# EAGLE board ttl (EAGLE 5.01)
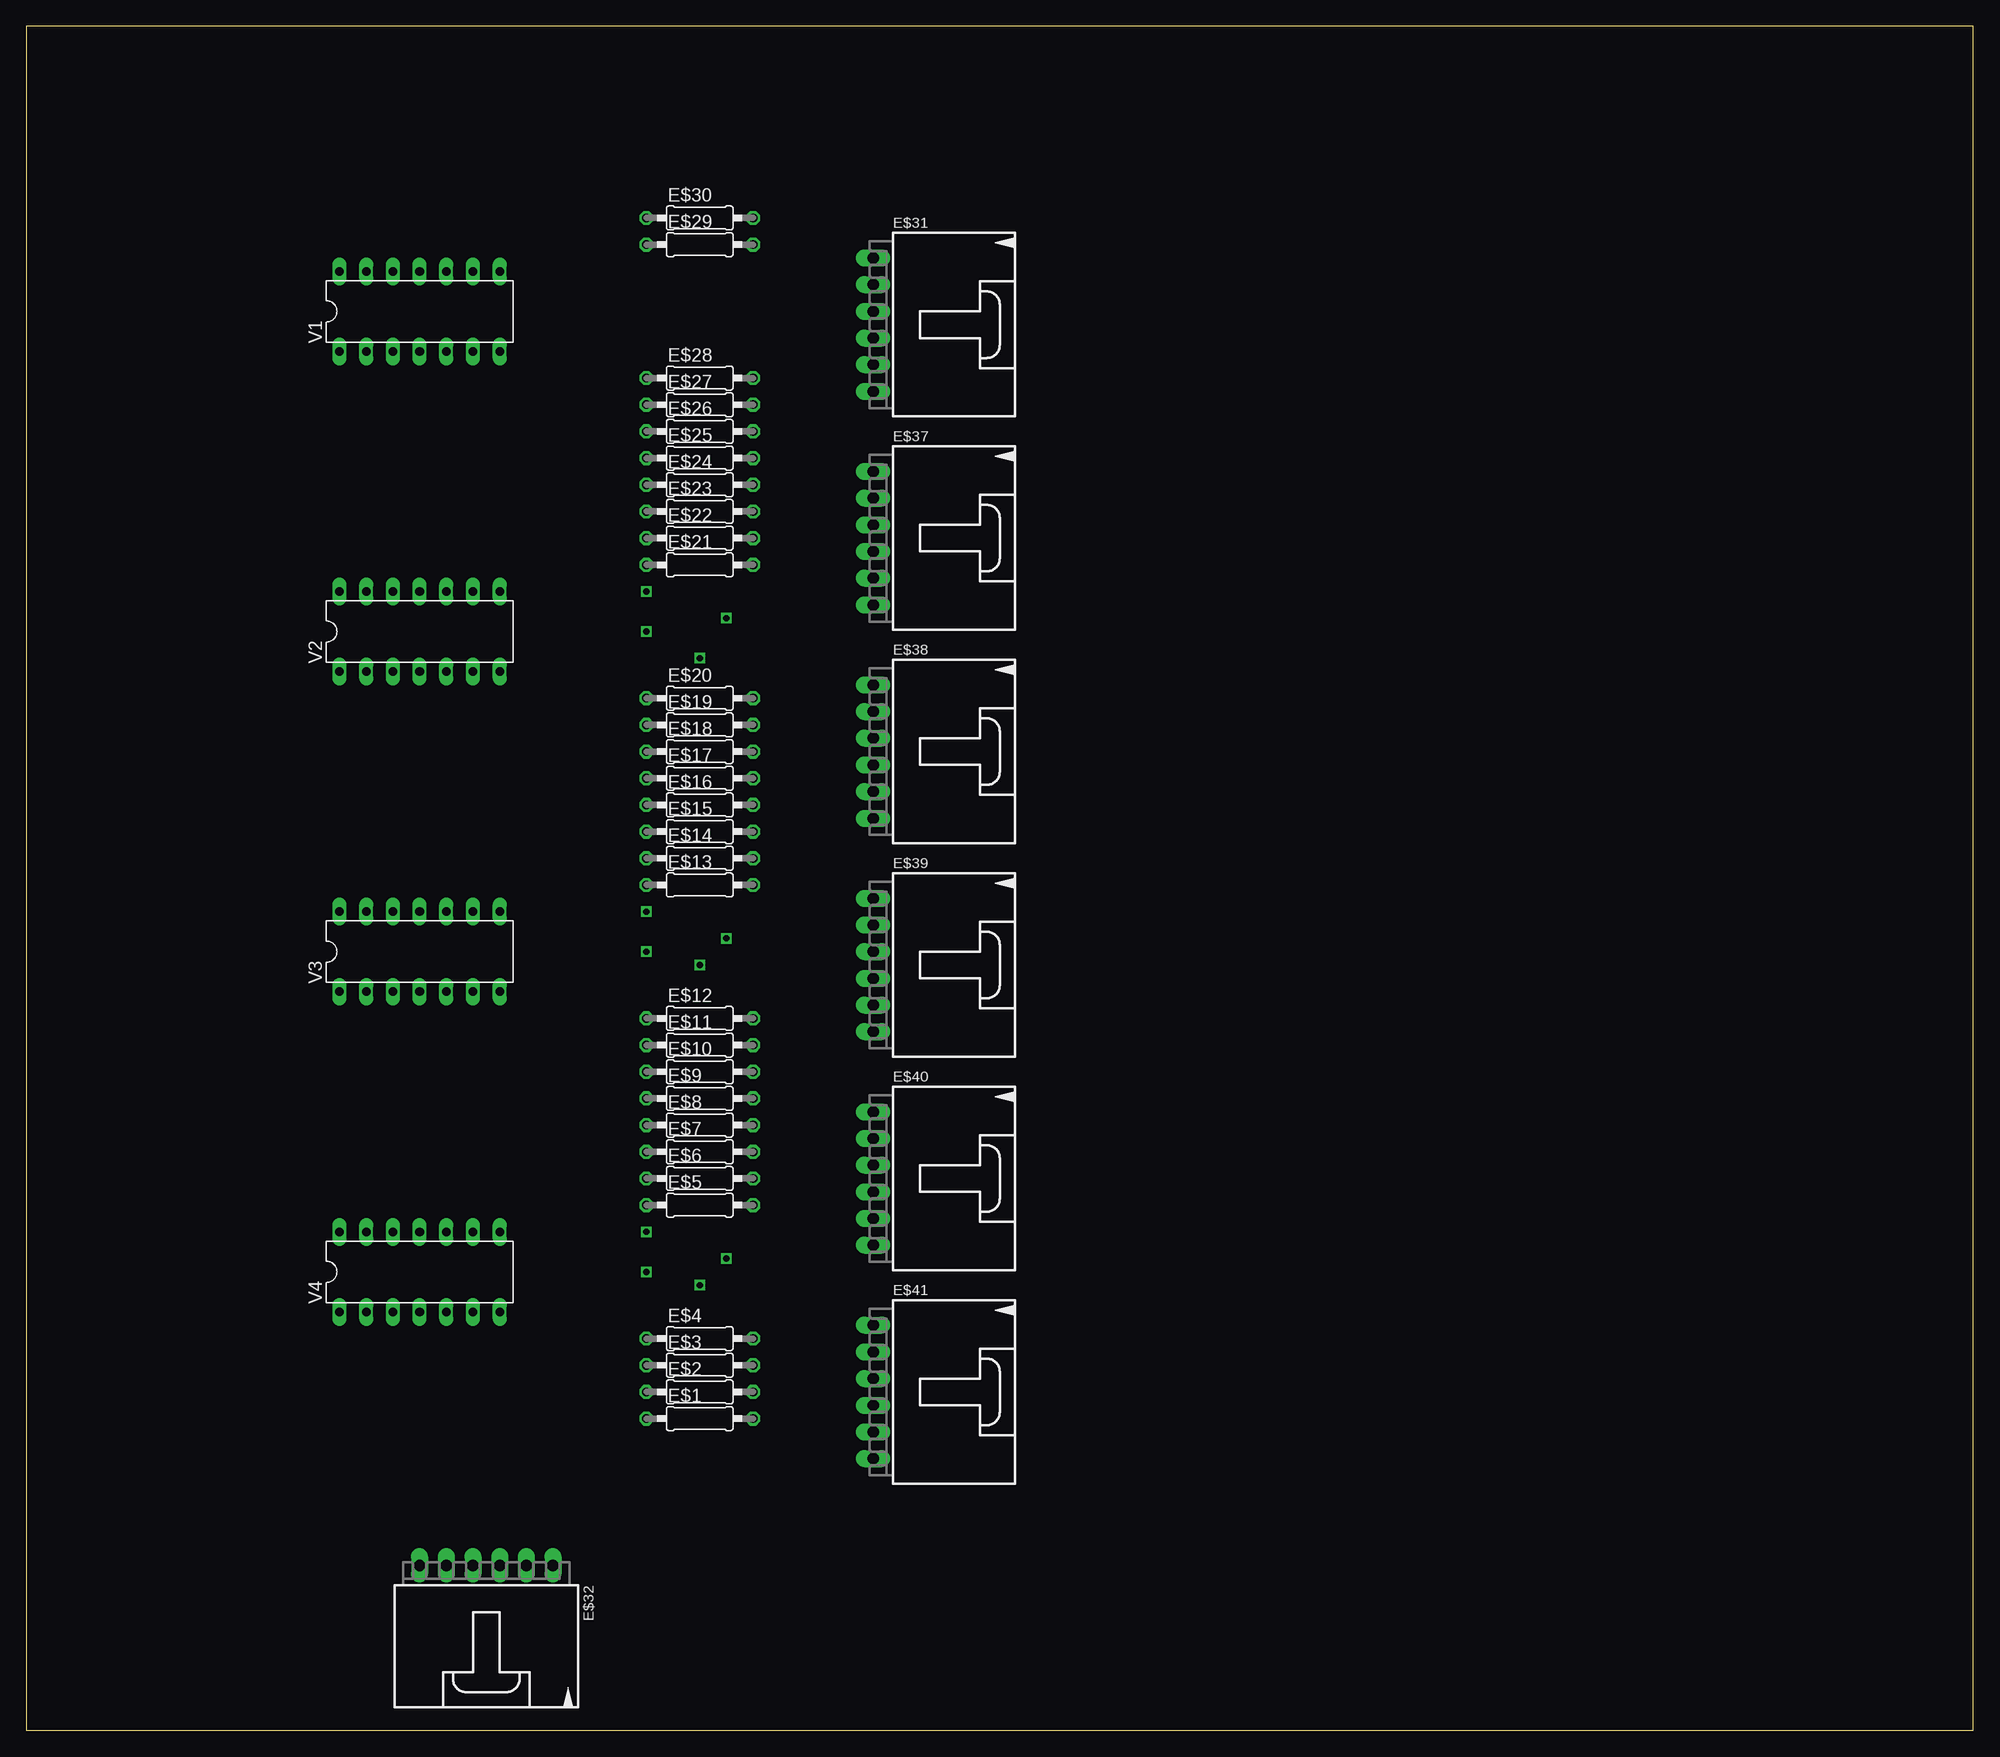
[diagram p0: board, top side]
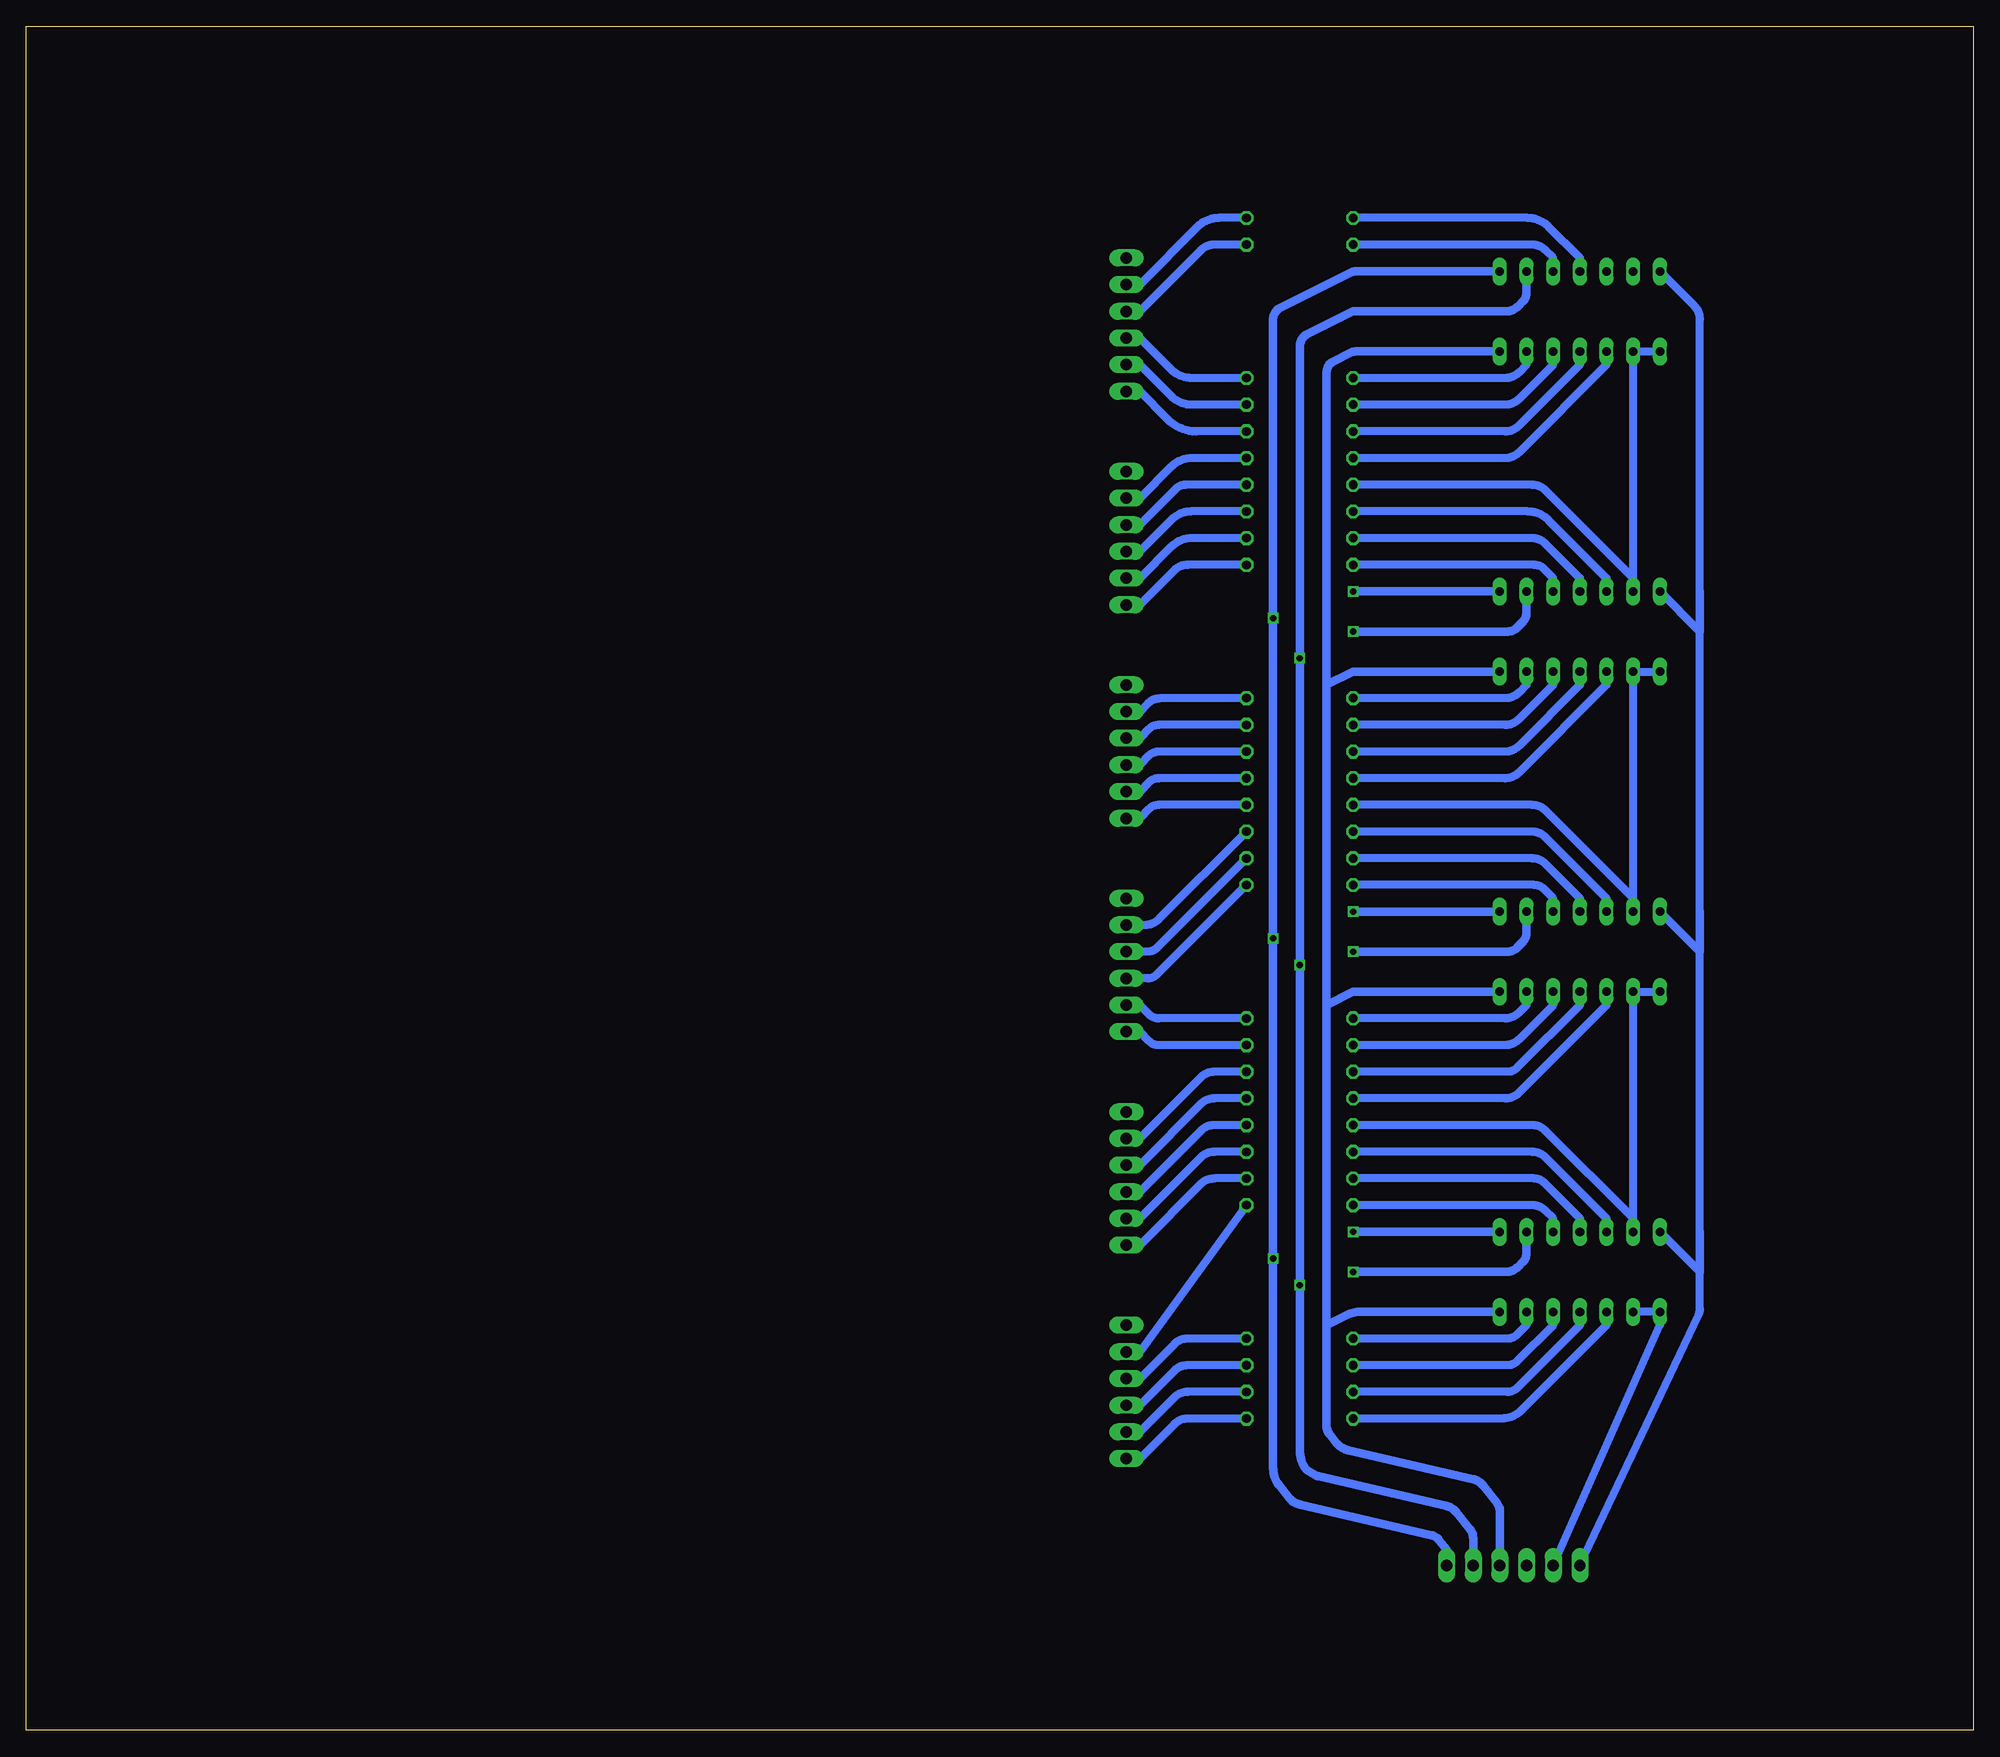
[diagram p1: board, bottom side, seen from below]

Size 185.4 x 162.23 mm. Coordinates in mm from the lower left corner, seen from the top.
Outline: 0,0 185.4,0 185.4,162.23 0,162.23 0,0
Copper layers (1*16): Top 0.035mm / dielectric 1.5mm / Bottom 0.035mm
Design rules "default *": minimum track width 30mil, minimum drill 24mil, track to track 8mil, track to pad 8mil, pad to pad 8mil, via to via 8mil, smd to smd 8mil, copper to edge 40mil, drill to drill 8mil, minimum pad ring 10mil, minimum via ring 8mil, stop-mask expansion 4mil, vias tented up to drill 0mil, thermal gap 10mil

## Footprints (pad centres in the part's own frame; a part is rotated, then mirrored left to right if it is on the bottom)
0207/10 = drill 0.813 octagon: 1 -5.08,0; 2 5.08,0
70553-06 = drill 1.092 long: 1 -6.35,-7.62; 2 -3.81,-7.62; 3 -1.27,-7.62; 4 1.27,-7.62; 5 3.81,-7.62; 6 6.35,-7.62
DIL14 = drill 0.813 long: 1 -7.62,-3.81; 2 -5.08,-3.81; 3 -2.54,-3.81; 4 0,-3.81; 5 2.54,-3.81; 6 5.08,-3.81; 7 7.62,-3.81; 8 7.62,3.81; 9 5.08,3.81; 10 2.54,3.81; 11 0,3.81; 12 -2.54,3.81; 13 -5.08,3.81; 14 -7.62,3.81

## Placement (x,y rotation side)
E$1  [0207/10]  64.13,29.68 0 top
E$2  [0207/10]  64.13,32.22 0 top
E$3  [0207/10]  64.13,34.76 0 top
E$4  [0207/10]  64.13,37.3 0 top
E$5  [0207/10]  64.13,50 0 top
E$6  [0207/10]  64.13,52.54 0 top
E$7  [0207/10]  64.13,55.08 0 top
E$8  [0207/10]  64.13,57.62 0 top
E$9  [0207/10]  64.13,60.16 0 top
E$10  [0207/10]  64.13,62.7 0 top
E$11  [0207/10]  64.13,65.24 0 top
E$12  [0207/10]  64.13,67.78 0 top
E$13  [0207/10]  64.13,80.48 0 top
E$14  [0207/10]  64.13,83.02 0 top
E$15  [0207/10]  64.13,85.56 0 top
E$16  [0207/10]  64.13,88.1 0 top
E$17  [0207/10]  64.13,90.64 0 top
E$18  [0207/10]  64.13,93.18 0 top
E$19  [0207/10]  64.13,95.72 0 top
E$20  [0207/10]  64.13,98.26 0 top
E$21  [0207/10]  64.13,110.96 0 top
E$22  [0207/10]  64.13,113.5 0 top
E$23  [0207/10]  64.13,116.04 0 top
E$24  [0207/10]  64.13,118.58 0 top
E$25  [0207/10]  64.13,121.12 0 top
E$26  [0207/10]  64.13,123.66 0 top
E$27  [0207/10]  64.13,126.2 0 top
E$28  [0207/10]  64.13,128.74 0 top
E$29  [0207/10]  64.13,141.44 0 top
E$30  [0207/10]  64.13,143.98 0 top
E$31  [70553-06]  88.26,133.82 270 top
E$32  [70553-06]  43.81,8.09 180 top
E$37  [70553-06]  88.26,113.5 270 top
E$38  [70553-06]  88.26,93.18 270 top
E$39  [70553-06]  88.26,72.86 270 top
E$40  [70553-06]  88.26,52.54 270 top
E$41  [70553-06]  88.26,32.22 270 top
V1  74164N  [DIL14]  37.46,135.09 0 top
V2  74164N  [DIL14]  37.46,104.61 0 top
V3  74164N  [DIL14]  37.46,74.13 0 top
V4  74164N  [DIL14]  37.46,43.65 0 top

## Library data of the parts
E$1-E$30 = resistor
E$31 E$32 E$37-E$41 = con-molex
V1-V4 = 74ttl-din

## Nets
S$1: E$1.2 E$41.6
S$2: E$2.2 E$41.5
S$3: E$3.2 E$41.4
S$4: E$4.2 E$41.3
S$5: E$5.2 E$41.2
S$6: E$6.2 E$40.6
S$7: E$7.2 E$40.5
S$8: E$8.2 E$40.4
S$9: E$9.2 E$40.3
S$10: E$10.2 E$40.2
S$11: E$11.2 E$39.6
S$12: E$12.2 E$39.5
S$13: E$13.2 E$39.4
S$14: E$14.2 E$39.3
S$15: E$15.2 E$39.2
S$16: E$16.2 E$38.6
S$17: E$17.2 E$38.5
S$18: E$18.2 E$38.4
S$19: E$19.2 E$38.3
S$20: E$20.2 E$38.2
S$21: E$21.2 E$37.6
S$22: E$22.2 E$37.5
S$23: E$23.2 E$37.4
S$24: E$24.2 E$37.3
S$25: E$25.2 E$37.2
S$27: V2.8
S$28: E$2.1 V4.4
S$29: E$3.1 V4.5
S$30: E$4.1 V4.6
S$31: E$5.1 V4.10
S$32: E$6.1 V4.11
S$33: E$7.1 V4.12
S$34: E$8.1 V3.1 V3.2 V4.13
S$35: E$9.1 V3.3
S$36: E$10.1 V3.4
S$37: E$11.1 V3.5
S$38: E$12.1 V3.6
S$39: E$13.1 V3.10
S$40: E$14.1 V3.11
S$41: E$15.1 V3.12
S$42: E$16.1 V2.1 V2.2 V3.13
S$43: E$17.1 V2.3
S$44: E$18.1 V2.4
S$45: E$19.1 V2.5
S$46: E$20.1 V2.6
S$47: E$21.1 V2.10
S$48: E$22.1 V2.11
S$49: E$23.1 V2.12
S$50: E$24.1 V1.1 V1.2 V2.13
S$55: E$26.2 E$31.6
S$56: E$27.2 E$31.5
S$57: E$28.2 E$31.4
S$58: E$29.2 E$31.3
S$59: E$30.2 E$31.2
S$61: E$32.6 V1.14 V2.14 V3.14 V4.14
S$62: E$32.5 V4.1 V4.2
S$63: E$32.4
S$65: E$1.1 V4.3
S$66: E$32.2
S$70: E$32.1 V1.8
S$71: V2.9
S$72: V3.8
S$74: V4.8
S$80: E$32.3 V1.7

## Tracks (layer width: path | path; a pad name or v marks a point on that pad's centre or on a via)
S$1
  Bottom 0.762: E$41.6 79.37,25.87 76.09,29.15 arc45 74.82,29.68 E$1.2
S$2
  Bottom 0.762: E$2.2 74.82,32.22 arc-45 76.09,31.69 79.37,28.41 E$41.5
S$3
  Bottom 0.762: E$3.2 74.82,34.76 arc-45 76.09,34.23 79.37,30.95 E$41.4
S$4
  Bottom 0.762: E$4.2 74.82,37.3 arc-45 76.09,36.77 79.37,33.49 E$41.3
S$5
  Bottom 0.762: E$5.2 79.37,36.03 E$41.2
S$6
  Bottom 0.762: E$6.2 72.28,52.54 arc-45 73.55,52.01 79.37,46.19 E$40.6
S$7
  Bottom 0.762: E$7.2 72.28,55.08 arc-45 73.55,54.55 79.37,48.73 E$40.5
S$8
  Bottom 0.762: E$8.2 72.28,57.62 arc-45 73.55,57.09 79.37,51.27 E$40.4
S$9
  Bottom 0.762: E$9.2 72.28,60.16 arc-45 73.55,59.63 79.37,53.81 E$40.3
S$10
  Bottom 0.762: E$10.2 72.28,62.7 arc-45 73.55,62.17 79.37,56.35 E$40.2
S$11
  Bottom 0.762: E$11.2 77.57,65.24 arc45 78.47,65.61 79.37,66.51 E$39.6
S$12
  Bottom 0.762: E$12.2 77.57,67.78 arc45 78.47,68.15 79.37,69.05 E$39.5
S$13
  Bottom 0.762: E$13.2 77.73,71.96 arc45 78.63,71.59 E$39.4
S$14
  Bottom 0.762: E$14.2 77.73,74.5 arc45 78.63,74.13 E$39.3
S$15
  Bottom 0.762: E$15.2 77.57,77.2 arc45 78.84,76.67 E$39.2
S$16
  Bottom 0.762: E$16.2 77.57,88.1 arc-45 78.47,87.73 79.37,86.83 E$38.6
S$17
  Bottom 0.762: E$17.2 77.57,90.64 arc-45 78.47,90.27 79.37,89.37 E$38.5
S$18
  Bottom 0.762: E$18.2 77.57,93.18 arc-45 78.47,92.81 79.37,91.91 E$38.4
S$19
  Bottom 0.762: E$19.2 77.57,95.72 arc-45 78.47,95.35 79.37,94.45 E$38.3
S$20
  Bottom 0.762: E$20.2 77.36,98.26 arc-45 78.63,97.73 79.37,96.99 E$38.2
S$21
  Bottom 0.762: E$21.2 74.82,110.96 arc-45 76.09,110.43 79.37,107.15 E$37.6
S$22
  Bottom 0.762: E$22.2 74.38,113.5 arc-45 76.39,112.67 79.37,109.69 E$37.5
S$23
  Bottom 0.762: E$23.2 74.51,116.04 arc-45 76.3,115.3 79.37,112.23 E$37.4
S$24
  Bottom 0.762: E$24.2 75.03,118.58 arc-45 75.93,118.21 79.37,114.77 E$37.3
S$25
  Bottom 0.762: E$25.2 74.38,121.12 arc-45 76.39,120.29 79.37,117.31 E$37.2
S$26
  Bottom 0.762: 34.92,130.01 43.28,121.65 arc45 44.55,121.12 59.05,121.12
S$27  (via drill 0.6)
  Bottom 0.813: V2.8 v59.05,108.42
S$28
  Bottom 0.762: E$2.1 44.34,32.22 arc-45 43.44,32.59 37.46,38.57 V4.4
S$29
  Bottom 0.762: E$3.1 44.34,34.76 arc-45 43.44,35.13 40,38.57 V4.5
S$30
  Bottom 0.762: E$4.1 44.34,37.3 arc-45 43.44,37.67 42.54,38.57 V4.6
S$31
  Bottom 0.762: E$5.1 42.01,50 arc45 40.74,49.47 40,48.73 V4.10
S$32
  Bottom 0.762: E$6.1 41.8,52.54 arc45 40.9,52.17 37.46,48.73 V4.11
S$33
  Bottom 0.762: E$7.1 42.01,55.08 arc45 40.74,54.55 34.92,48.73 V4.12
S$34
  Bottom 0.762: V4.13 32.38,48.73 40.74,57.09 arc-45 42.01,57.62 E$8.1 | V3.1 V3.2 V4.13 | V4.13 32.38,57.62
S$35
  Bottom 0.762: E$9.1 44.55,60.16 arc-45 43.28,60.69 34.92,69.05 V3.3
S$36
  Bottom 0.762: E$10.1 44.34,62.7 arc-45 43.44,63.07 37.46,69.05 V3.4
S$37
  Bottom 0.762: E$11.1 44.55,65.24 arc-45 43.28,65.77 40,69.05 V3.5
S$38
  Bottom 0.762: E$12.1 44.55,67.78 arc-45 43.28,68.31 42.54,69.05 V3.6
S$39
  Bottom 0.762: E$13.1 41.8,80.48 arc45 40.9,80.11 40,79.21 V3.10
S$40
  Bottom 0.762: E$14.1 42.01,83.02 arc45 40.74,82.49 37.46,79.21 V3.11
S$41
  Bottom 0.762: E$15.1 42.01,85.56 arc45 40.74,85.03 34.92,79.21 V3.12
S$42
  Bottom 0.762: V3.13 32.38,79.21 40.74,87.57 arc-45 42.01,88.1 E$16.1 | V2.1 V2.2 V3.13 | V3.13 32.38,88.1
S$43
  Bottom 0.762: E$17.1 44.55,90.64 arc-45 43.28,91.17 34.92,99.53 V2.3
S$44
  Bottom 0.762: E$18.1 44.55,93.18 arc-45 43.28,93.71 37.46,99.53 V2.4
S$45
  Bottom 0.762: E$19.1 44.55,95.72 arc-45 43.28,96.25 40,99.53 V2.5
S$46
  Bottom 0.762: E$20.1 44.55,98.26 arc-45 43.28,98.79 42.54,99.53 V2.6
S$47
  Bottom 0.762: E$21.1 41.8,110.96 arc45 40.9,110.59 40,109.69 V2.10
S$48
  Bottom 0.762: E$22.1 42.01,113.5 arc45 40.74,112.97 37.46,109.69 V2.11
S$49
  Bottom 0.762: E$23.1 42.45,116.04 arc45 40.44,115.21 34.92,109.69 V2.12
S$50
  Bottom 0.762: V1.1 V1.2 V2.13 32.38,109.69 | 32.38,109.69 40.74,118.05 arc-45 42.01,118.58 E$24.1 | 32.38,109.69 32.38,118.58
S$51
  Bottom 0.762: 37.46,130.01 43.28,124.19 arc45 44.55,123.66 59.05,123.66
S$52
  Bottom 0.762: 40,130.01 43.28,126.73 arc45 44.55,126.2 59.05,126.2
S$53
  Bottom 0.762: 42.54,130.01 43.28,129.27 arc45 44.55,128.74 59.05,128.74
S$54
  Bottom 0.762: 37.46,140.17 40.44,143.15 arc-45 42.45,143.98 59.05,143.98
S$55
  Bottom 0.762: E$26.2 73.98,123.66 arc45 76.68,124.78 79.37,127.47 E$31.6
S$56
  Bottom 0.762: E$27.2 74.38,126.2 arc45 76.39,127.03 79.37,130.01 E$31.5
S$57
  Bottom 0.762: E$28.2 74.38,128.74 arc45 76.39,129.57 79.37,132.55 E$31.4
S$58
  Bottom 0.762: E$29.2 72.28,141.44 arc-45 73.55,140.91 79.37,135.09 E$31.3
S$59
  Bottom 0.762: E$30.2 71.84,143.98 arc-45 73.85,143.15 79.37,137.63 E$31.2
S$60
  Bottom 0.762: 40,140.17 40.74,140.91 arc-45 42.01,141.44 59.05,141.44
S$61
  Bottom 0.762: 26.03,47.46 26.03,77.94 | 26.03,77.94 26.03,108.42 | 26.03,108.42 26.03,134.35 arc-45 26.56,135.62 V1.14 | E$32.6 26.15,39.58 arc-25 26.03,40.13 26.03,47.46 | 26.03,108.42 26.03,104.61 V2.14 | 26.03,77.94 26.03,74.13 V3.14 | 26.03,47.46 26.03,43.65 V4.14
S$62
  Bottom 0.762: V4.1 V4.2 V4.1 | E$32.5 29.84,38.57 V4.1
S$63
  Bottom 0.762: E$32.4 42.54,16.98
S$65
  Bottom 0.762: E$1.1 44.99,29.68 arc-45 42.98,30.51 34.92,38.57 V4.3
S$66  (via drill 0.6)
  Bottom 0.813: 59.05,135.09 63.43,132.9 arc-63 64.13,131.77 v64.13,102.07 v64.13,72.86 v64.13,42.38 64.13,26.64 arc-39 63.49,24.8 62.89,24.42 arc-19 62.29,24.18 50.21,21.39 arc39 49.19,20.75 47.92,19.14 arc39 47.62,18.29 E$32.2
S$67
  Bottom 0.813: 45.08,100.8 59.05,100.8 61.59,99.53
S$68
  Bottom 0.813: 45.08,70.32 59.05,70.32 61.59,69.05
S$69
  Bottom 0.813: 61.59,38.57 59.59,39.57 arc27 58.45,39.84 45.08,39.84
S$70  (via drill 0.6)
  Bottom 0.813: V1.8 58.75,138.9 arc-27 59.32,138.77 65.97,135.44 arc-63 66.67,134.31 v66.67,105.88 v66.67,75.4 v66.67,44.92 66.67,24.99 arc-39 66.11,23.37 65.1,22.1 arc-39 64.08,21.46 51.66,18.6 arc39 50.81,18.06 50.16,17.24 E$32.1
S$71  (via drill 0.6)
  Bottom 0.813: v59.05,104.61 44.34,104.61 arc-45 43.44,104.98 42.91,105.51 arc-45 42.54,106.41 V2.9
S$72  (via drill 0.6)
  Bottom 0.813: v59.05,77.94 V3.8
S$73  (via drill 0.6)
  other vias: 59.05,74.13
S$74  (via drill 0.6)
  Bottom 0.813: v59.05,47.46 V4.8
S$75  (via drill 0.6)
  other vias: 59.05,43.65
S$76
  Bottom 0.813: 59.05,74.13 44.34,74.13 arc-45 43.44,74.5 42.91,75.03 arc-45 42.54,75.93 42.54,77.94
S$77
  Bottom 0.813: 59.05,43.65 44.55,43.65 arc-45 43.28,44.18 42.91,44.55 arc-45 42.54,45.45 42.54,47.46
S$78
  Bottom 0.813: 59.05,135.09 44.55,135.09 arc-45 43.28,135.62 42.91,135.99 arc-45 42.54,136.89 42.54,138.9
S$80
  Bottom 0.813: V1.7 58.75,131.28 arc-27 59.32,131.15 60.89,130.36 arc-63 61.59,129.22 61.59,29.02 arc-39 61.31,28.22 60.62,27.36 arc-39 59.53,26.66 47.67,23.93 arc39 46.65,23.29 45.38,21.68 arc39 45.08,20.83 E$32.3